# Altium PCB DASHBOARD.PcbDoc
Units mm, origin at the board's own origin, x right, y up, seen from the top; angles counter-clockwise.
Board outline 104.98 x 20.04 mm, 2 copper layers (Top Layer, Bottom Layer); 15 components, 16 nets, 82 pads, 2 vias.
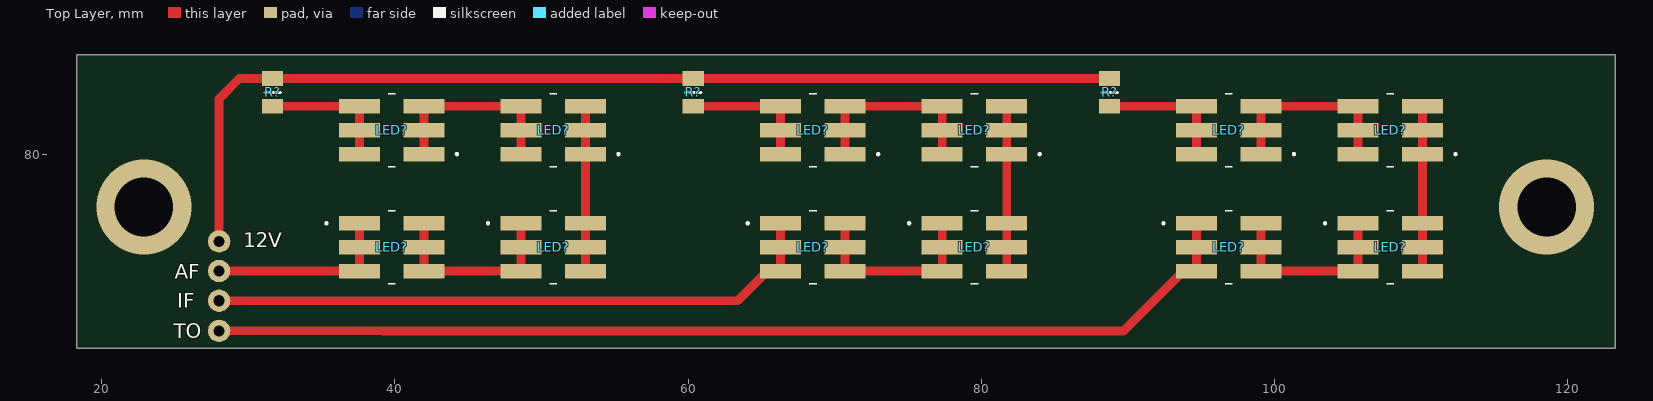
[diagram p0: Top Layer view]
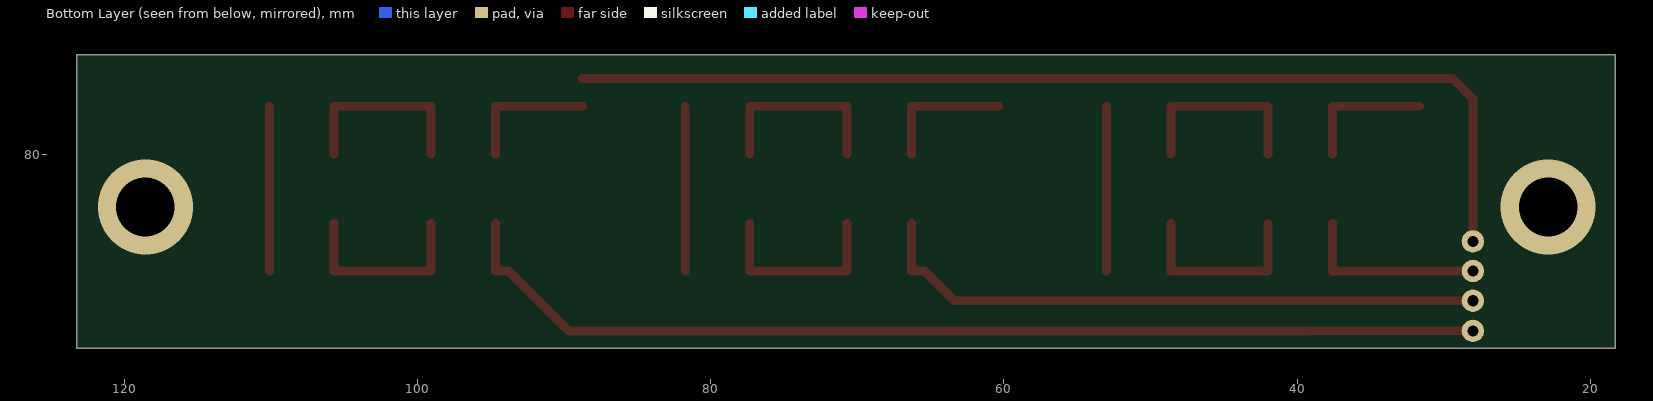
[diagram p1: Bottom Layer view, seen from below]
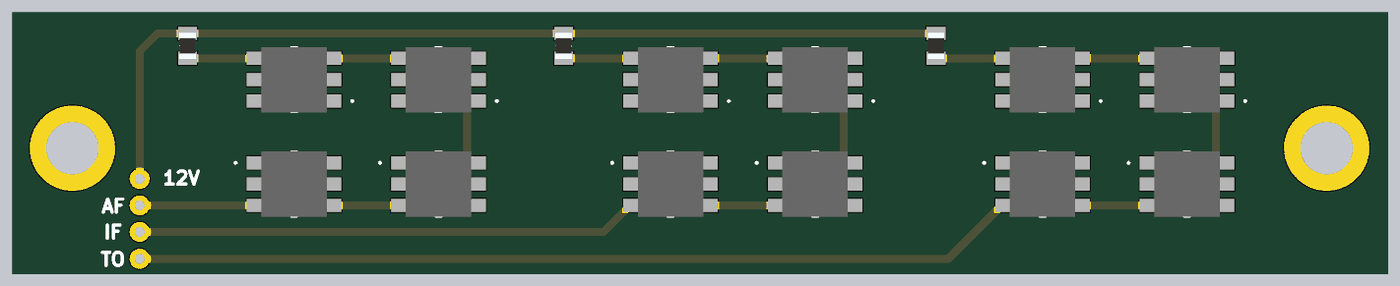
[diagram p2: 3D render of the assembled board from above, using the file's embedded part models]

## Layer stack, top to bottom
Top Solder: solder mask 0.0102, Solder Resist, Dk 3.5
Top Layer: signal copper 0.0356
Dielectric 1: dielectric 0.32, FR-4, Dk 4.8
Bottom Layer: signal copper 0.0356
Bottom Solder: solder mask 0.0102, Solder Resist, Dk 3.5

## Board outline
123.26,86.843 123.26,66.802 18.275,66.802 18.275,86.843

## Design rules (kind name [scope] priority, off if disabled: settings)
Clearance [All] p1: gap=0.254 ignorepadtopadclearanceinfootprint=FALSE except(0: Arc-Hole Track-Hole SMDPad-Hole THPad-Hole Via-Hole Fill-Hole Poly-Hole Region-Hole Text-Hole)
PolygonConnect [All] p1: connectstyle=Relief reliefconductorwidth=0.254 reliefentries=4 polygonreliefangle="90 Angle" airgapwidth=0.254
RoutingVias [All] p1: holewidth=0.711 width=1.27 viastyle="Through Hole" minholewidth=0.711 minwidth=1.27 maxholewidth=0.711 maxwidth=1.27
SolderMaskExpansion [All] p1: expansion=0.102 istentingtop=FALSE
Width Width_2 [All] p1: maxlimit=0.6 minlimit=0.6 preferedwidth=0.6 minimp=50.000000 maximp=50.000000 favimp=50.000000
Width Width_1 [All] p2: maxlimit=0.6 minlimit=0.6 preferedwidth=0.6 minimp=50.000000 maximp=50.000000 favimp=50.000000
Width [All] p3: maxlimit=0.254 minlimit=0.254 preferedwidth=0.254
30 further rules are at their usual default settings.

## Classes and differential pairs
component class DASHBOARD: LED? R?

## Components (designator, comment, footprint, x,y, rotation, side; value= is the part's Value field where it differs from the comment)
LED? "150505RS73300" 150505RS73300 96.877,73.699 r0 top
LED? "150505RS73300" 150505RS73300 79.527,73.699 r0 top
LED? "150505RS73300" 150505RS73300 68.507,81.681 r180 top
LED? "150505RS73300" 150505RS73300 68.507,73.699 r0 top
LED? "150505RS73300" 150505RS73300 79.527,81.681 r180 top
LED? "150505RS73300" 150505RS73300 96.877,81.681 r180 top
LED? "150505RS73300" 150505RS73300 39.775,73.699 r0 top
LED? "150505RS73300" 150505RS73300 50.795,73.699 r0 top
LED? "150505RS73300" 150505RS73300 107.897,81.681 r180 top
LED? "150505RS73300" 150505RS73300 39.775,81.681 r180 top
LED? "150505RS73300" 150505RS73300 50.795,81.681 r180 top
LED? "150505RS73300" 150505RS73300 107.897,73.699 r0 top
R? "CPF0805B100RE1" RESC2012X65N 31.651,84.261 r270 top
R? "CPF0805B100RE1" RESC2012X65N 60.351,84.261 r270 top
R? "CPF0805B100RE1" RESC2012X65N 88.75,84.261 r270 top

## Footprints (in the part's own frame and the unit in brackets; to place one, negate y for a bottom-side part, rotate by r counter-clockwise, add the part's x,y. Pads: shape width x height; smd on the part's side, far side on the other; paste and mask are expansions set on the pad)
150505RS73300 [mm]
  rect 2.8x1 smd: 1(-2.2,1.63) 2(2.2,1.63) 3(-2.2,0) 4(2.2,0) 5(-2.2,-1.63) 6(2.2,-1.63)
  silkscreen extent -4.5,-2.5 0.25,2.5, body extent -2.5,-2.5 2.5,2.5, height 1.75
RESC2012X65N [mm]
  rect 1x1.45 smd: 1(-0.95,0) 2(0.95,0)
  silkscreen extent 0,-0.53 0,0.53, body extent -1,-0.63 1,0.63, height 0.65

## Part data
LED? LED? LED? LED? LED? LED? LED? LED? LED? LED? LED? LED?: "LED", Manufacturer_Name="Wurth Elektronik", Mouser Part Number=710-150505RS73300, Datasheet Link=https://www.we-online.com/catalog/datasheet/150505RS73300.pdf, Height=1.65mm, Manufacturer_Part_Number=150505RS73300, Mouser Price/Stock=https://www.mouser.co.uk/ProductDetail/Wurth-Elektronik/150505RS73300?qs=GedFDFLaBXFwseFXntEuXA%3D%3D
R? R? R?: "Resistor", Manufacturer_Name="TE Connectivity", Mouser Part Number=279-CPF0805B100RE1, Arrow Part Number=CPF0805B100RE1, Arrow Price/Stock=https://www.arrow.com/en/products/cpf0805b100re1/te-connectivity?region=nac, Datasheet Link=https://datasheet.datasheetarchive.com/originals/distributors/DKDS-21/401696.pdf, Height=0.65mm, Manufacturer_Part_Number=CPF0805B100RE1, Mouser Price/Stock=https://www.mouser.co.uk/ProductDetail/TE-Connectivity-Holsworthy/CPF0805B100RE1?qs=9ylKvqdyudkCWLPT1QvLZQ%3D%3D

## Free pads (board coordinates)
  round 1.524 hole 0.762: 7(28,74.097) 8(28,72.078) 9(28,70.048) 10(28,67.993)

## Via types
v1: diameter 6.5, hole 4, Top Layer to Bottom Layer, 2 vias

## Nets (pads, with @x,y where several pads share a name; then routed paths per layer and width w, separated by ;. In a path a pad name is that pad's centre, name@x,y a point inside that pad or via, vN(x,y) a via of type N, cw(c..) or ccw(c..) an arc to the next point about the centre after c; other vN are vias at no path point)
1: LED?.1@48.595,75.329 LED?.2@41.975,75.329 LED?.3@48.595,73.699 LED?.4@41.975,73.699 LED?.5@48.595,72.069 LED?.6@41.975,72.069 | length 13.1
  Top Layer w0.6: LED?.2@41.975,75.329 41.975,73.699 41.975,72.069 48.595,72.069 48.595,73.699 LED?.1@48.595,75.329
2: LED?.1@52.995,80.051 LED?.2@52.995,75.329 LED?.3@52.995,81.681 LED?.4@52.995,73.699 LED?.5@52.995,83.311 LED?.6@52.995,72.069 | length 11.2
  Top Layer w0.6: LED?.6@52.995,72.069 52.995,73.699 52.995,75.329 52.995,80.051 52.995,81.681 LED?.5@52.995,83.311
4: LED?.2@37.575,80.051 LED?.4@37.575,81.681 LED?.6@37.575,83.311 R?.2@31.651,83.311 | length 9.2
  Top Layer w0.6: R?.2@31.651,83.311 37.575,83.311 37.575,81.681 LED?.2@37.575,80.051
5: LED?.2@66.307,80.051 LED?.4@66.307,81.681 LED?.6@66.307,83.311 R?.2@60.351,83.311 | length 9.2
  Top Layer w0.6: R?.2@60.351,83.311 66.307,83.311 66.307,81.681 LED?.2@66.307,80.051
6: LED?.1@77.327,75.329 LED?.2@70.707,75.329 LED?.3@77.327,73.699 LED?.4@70.707,73.699 LED?.5@77.327,72.069 LED?.6@70.707,72.069 | length 13.1
  Top Layer w0.6: LED?.2@70.707,75.329 70.707,73.699 70.707,72.069 77.327,72.069 77.327,73.699 LED?.1@77.327,75.329
7: LED?.1@81.727,80.051 LED?.2@81.727,75.329 LED?.3@81.727,81.681 LED?.4@81.727,73.699 LED?.5@81.727,83.311 LED?.6@81.727,72.069 | length 11.2
  Top Layer w0.6: LED?.6@81.727,72.069 81.727,73.699 81.727,75.329 81.727,80.051 81.727,81.681 LED?.5@81.727,83.311
8: LED?.2@94.677,80.051 LED?.4@94.677,81.681 LED?.6@94.677,83.311 R?.2@88.75,83.311 | length 9.2
  Top Layer w0.6: R?.2@88.75,83.311 94.677,83.311 94.677,81.681 LED?.2@94.677,80.051
9: LED?.1@105.697,75.329 LED?.2@99.077,75.329 LED?.3@105.697,73.699 LED?.4@99.077,73.699 LED?.5@105.697,72.069 LED?.6@99.077,72.069 | length 13.1
  Top Layer w0.6: LED?.2@99.077,75.329 99.077,73.699 99.077,72.073 99.073,72.069 105.697,72.069 105.697,73.699 LED?.1@105.697,75.329
10: LED?.1@110.097,80.051 LED?.2@110.097,75.329 LED?.3@110.097,81.681 LED?.4@110.097,73.699 LED?.5@110.097,83.311 LED?.6@110.097,72.069 | length 11.2
  Top Layer w0.6: LED?.6@110.097,72.069 110.097,73.699 110.097,75.329 110.097,80.051 110.097,81.681 LED?.5@110.097,83.311
17: LED?.1@41.975,80.051 LED?.2@48.595,80.051 LED?.3@41.975,81.681 LED?.4@48.595,81.681 LED?.5@41.975,83.311 LED?.6@48.595,83.311 | length 13.1
  Top Layer w0.6: LED?.1@41.975,80.051 41.975,81.681 41.975,83.311 48.595,83.311 48.595,81.681 LED?.2@48.595,80.051
18: LED?.1@99.077,80.051 LED?.2@105.697,80.051 LED?.3@99.077,81.681 LED?.4@105.697,81.681 LED?.5@99.077,83.311 LED?.6@105.697,83.311 | length 13.1
  Top Layer w0.6: LED?.1@99.077,80.051 99.077,81.681 99.077,83.311 105.697,83.311 105.697,81.681 LED?.2@105.697,80.051
20: LED?.1@70.707,80.051 LED?.2@77.327,80.051 LED?.3@70.707,81.681 LED?.4@77.327,81.681 LED?.5@70.707,83.311 LED?.6@77.327,83.311 | length 13.1
  Top Layer w0.6: LED?.1@70.707,80.051 70.707,81.681 70.707,83.311 77.327,83.311 77.327,81.681 LED?.2@77.327,80.051
+12: pad.7 R?.1 | length 71.1
  Top Layer w0.6: pad.7 28,83.829 29.382,85.211 31.651,85.211 60.351,85.211 R?.1@88.75,85.211
AF: LED?.1@37.575,75.329 LED?.3@37.575,73.699 LED?.5@37.575,72.069 pad.8 | length 12.8
  Top Layer w0.6: pad.8 28.004,72.074 37.57,72.074 37.575,72.069 37.575,73.699 LED?.1@37.575,75.329
IF: LED?.1@66.307,75.329 LED?.3@66.307,73.699 LED?.5@66.307,72.069 pad.9 | length 42.4
  Top Layer w0.6: pad.9 63.386,70.048 65.407,72.069 66.307,72.069 66.307,73.699 LED?.1@66.307,75.329
TSOFF: LED?.1@94.677,75.329 LED?.3@94.677,73.699 LED?.5@94.677,72.069 pad.10 | length 71.6
  Top Layer w0.6: pad.10 39.113,67.993 39.129,67.977 89.685,67.977 93.777,72.069 94.677,72.069 94.677,73.699 LED?.1@94.677,75.329
copper on no net:
  other v1: 22.871,76.445 118.56,76.445

## Silkscreen, mask and mechanical layers (free items; w line width, h text height)
Top Overlay:
  text "12V" at 29.639,73.687 h1
  text "AF" at 24.967,71.551 h1
  text "IF" at 25.13,69.559 h1
  text "TO" at 24.892,67.478 h1